# EAGLE board v2nixie (EAGLE 9.6.2)
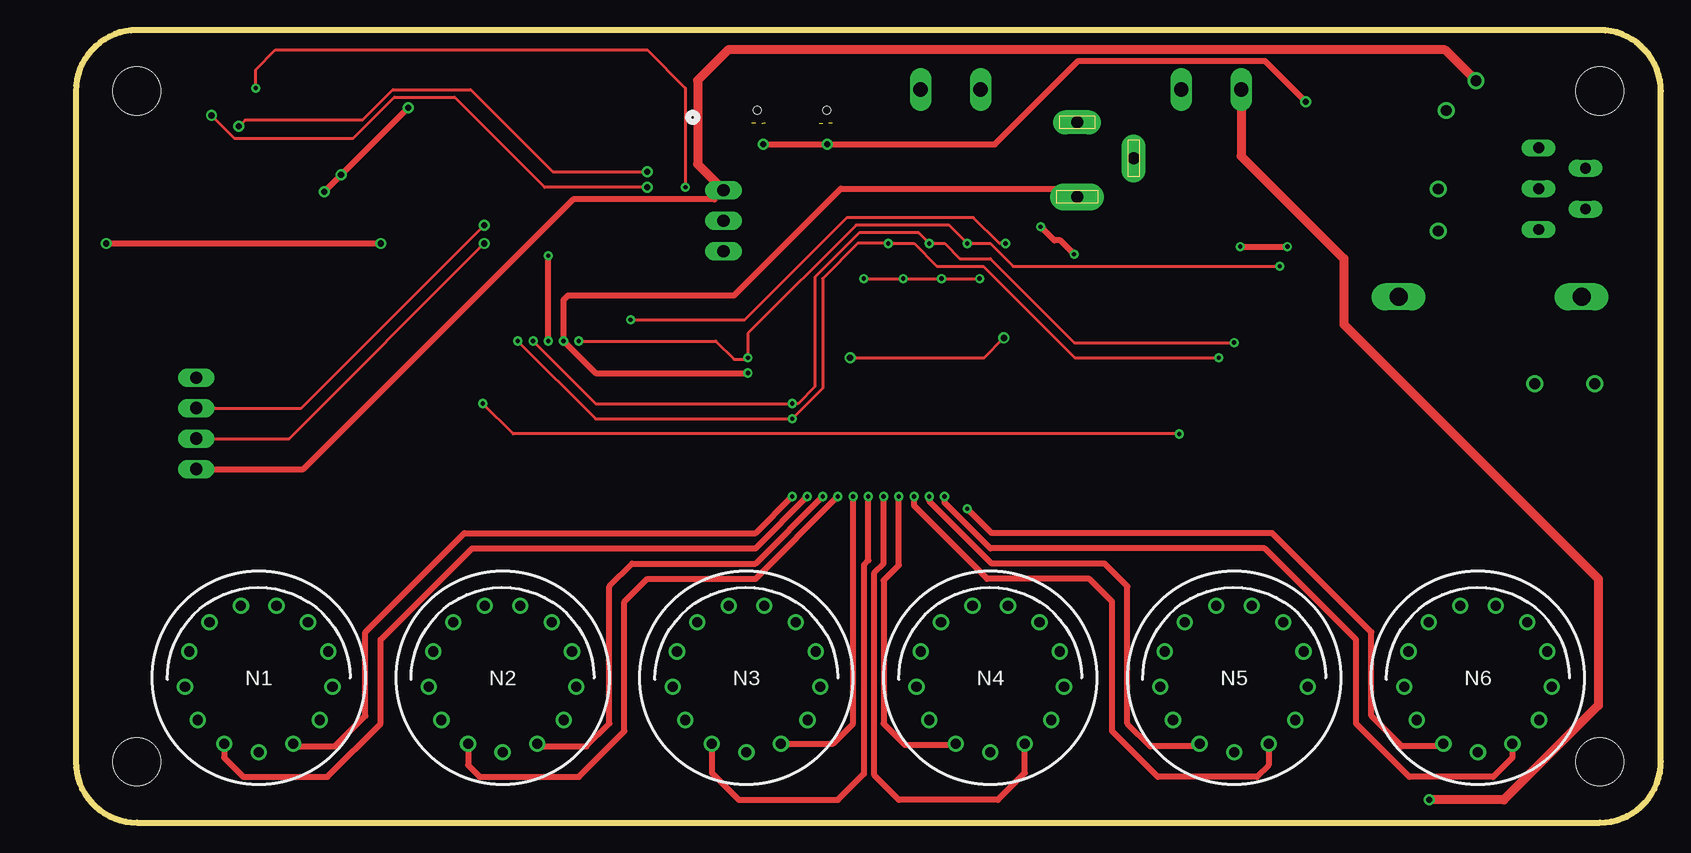
[diagram p0: board, top side]
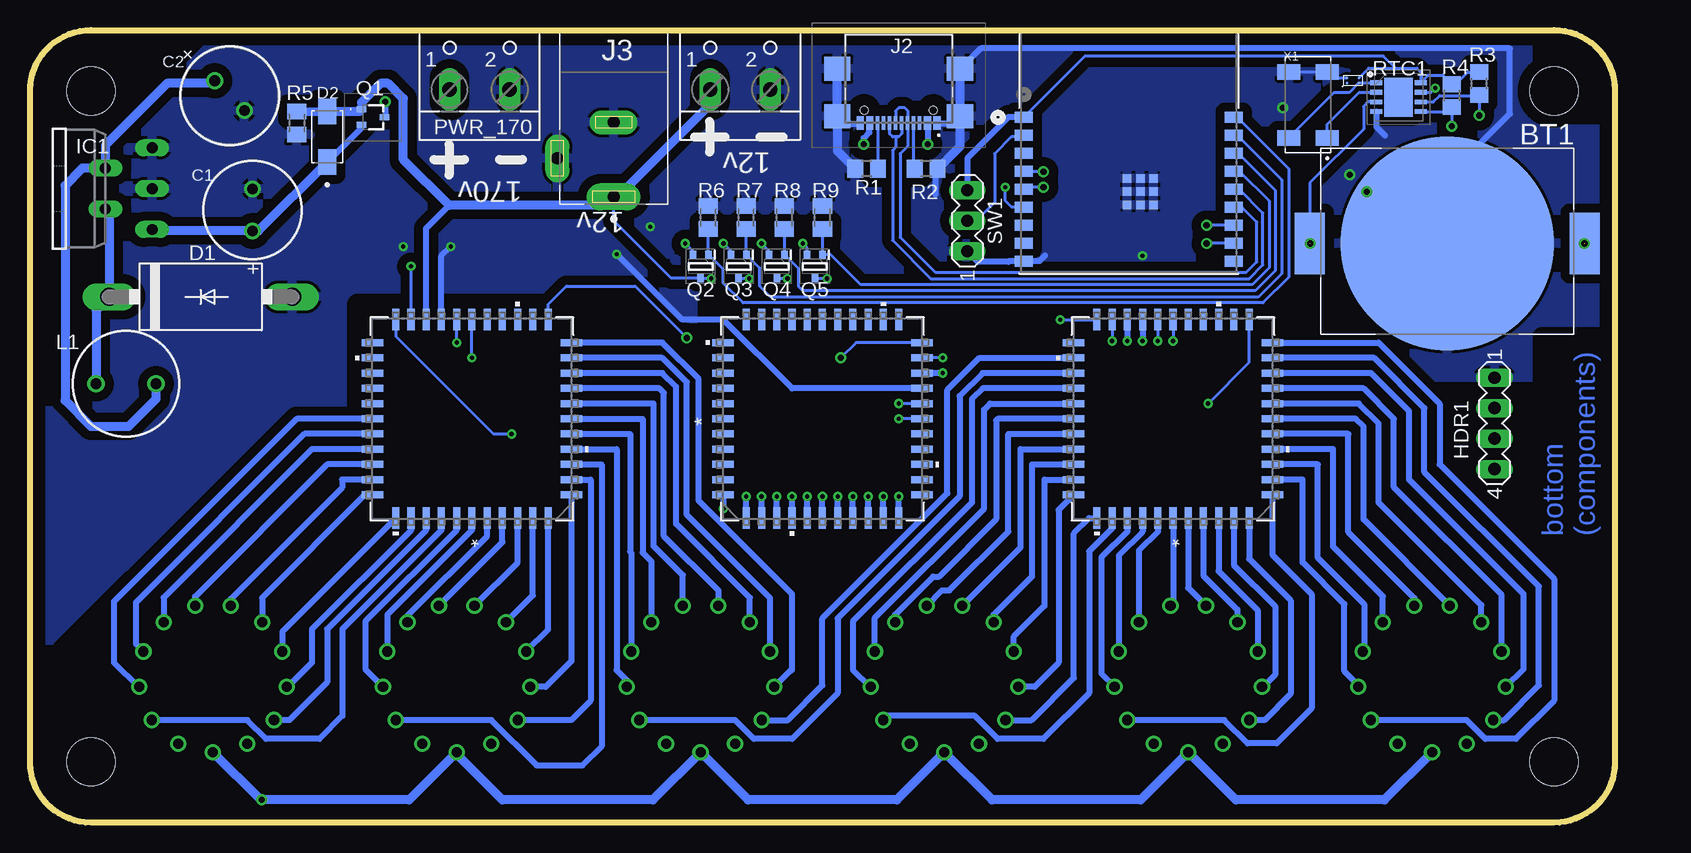
[diagram p1: board, bottom side, seen from below]

Size 132.08 x 66.04 mm. Coordinates in mm from the lower left corner, seen from the top.
Outline: 0,60.96 0,5.08 arc90 5.08,0 127,0 arc90 132.08,5.08 132.08,60.96 arc90 127,66.04 5.08,66.04 arc90 0,60.96
Copper layers (1*16): Top 0.035mm / dielectric 1.5mm / Bottom 0.035mm
Design rules "default *": minimum track width 6mil, minimum drill 0.35mm, track to track 10mil, track to pad 6mil, pad to pad 6mil, via to via 6mil, smd to smd 6mil, copper to edge 40mil, drill to drill 6mil, minimum pad ring 10mil, minimum via ring 8mil, stop-mask expansion 4mil, vias tented up to drill 0mil, thermal gap 10mil
Holes 4 mm at 5.08,60.96 127,60.96 127,5.08 5.08,5.08
bRestrict: area 27.3,24.1 to 46.4,43.2; area 56.5,24.1 to 75.6,43.2; area 85.7,24.1 to 104.8,43.2; area 49.1,46.5 to 52.8,51.3; area 111.8,-1.4 to 135.5,20.3; area 117.8,54.1 to 139.4,77.9; area -2.2,59.1 to 6,67.6; area 0.8,23.2 to 14.6,39.9

## Footprints (pad centres in the part's own frame; a part is rotated, then mirrored left to right if it is on the bottom)
BAT_BAT-HLD-001-TR = smd 17.8 x 17.8: N1 0,0 | smd 2.5 x 5.1: P1 -11.45,0; P2 11.45,0
WCAP-PTG5_8X11.5(DXL) = drill 0.9: 1 1.75,0; 2 -1.75,0
WCAP-PTG5_8X8(DXL) = drill 0.9: 1 1.75,0; 2 -1.75,0
DO201-15 = drill 1.499 long: A 7.62,0; C -7.62,0
DIOM4325X250N = smd 2.12 x 1.5: A 2.115,0; C -2.115,0
MA04-1 = drill 1.016 long: 1 -3.81,0; 2 -1.27,0; 3 1.27,0; 4 3.81,0
TO220-5 = drill 0.9 long: 1 -3.4,-8.4; 2 -1.7,-4.5; 3 0,-8.4; 4 1.7,-4.5; 5 3.4,-8.4
USB4110GFA = smd 0.3 x 1.15: A1 -3.35,3.678; A4 -2.55,3.678; A5 -1.25,3.678; A6 -0.25,3.678; A7 0.25,3.678; A8 1.25,3.678; A9 2.55,3.678; A12 3.35,3.678; B1 3.05,3.678; B4 2.25,3.678; B5 1.75,3.678; B6 0.75,3.678; B7 -0.75,3.678; B8 -1.75,3.678; B9 -2.25,3.678; B12 -3.05,3.678 | smd 2.18 x 2: MP1 -5.11,-0.827; MP2 5.11,-0.827; MP3 -5.11,3.103; MP4 5.11,3.103 | hole 0.65: -2.89,2.603; 2.89,2.603
KYCON_KLDX-0202-AC = drill 1 pad 2.25 long: 1 -6.65,0 | drill 1 pad 2 long: 2 -0.45,0; 3 -3.45,4.7
6000-XXXX-RC = drill 0.9 pad 1.422: 1 -2.5,0; 2 2.5,0
IN-14 = drill 0.84: 0 5.094,-3.516; 1 -5.094,-3.516; 2 -6.145,-0.746; 3 -5.788,2.195; 4 -4.105,4.633; 5 -1.481,6.01; 6 1.481,6.01; 7 4.105,4.633; 8 5.788,2.195; 9 6.145,-0.746; A 0,-6.19; LHDP 2.877,-5.481; RHDP -2.877,-5.481
W237-102 = drill 1.194 long: 1 -2.5,-1.27; 2 2.5,-1.27
SSM3J117TULFT = smd 0.5 x 0.8: 1 -0.65,-0.95; 2 0.65,-0.95; 3 0,0.95
SOTFL65P210X105-3N = smd 0.695 x 0.54: 1 -0.972,0.65; 2 -0.972,-0.65; 3 0.972,0
R0805 = smd 1.3 x 1.5: 1 -0.95,0; 2 0.95,0
M0805 = smd 1.3 x 1.6: 1 -0.95,0; 2 0.95,0
SON80P400X400X100-9N = smd 1 x 0.4: 1 -1.85,1.2; 2 -1.85,0.4; 3 -1.85,-0.4; 4 -1.85,-1.2; 5 1.85,-1.2; 6 1.85,-0.4; 7 1.85,0.4; 8 1.85,1.2 | smd 2.35 x 3.25: 9 0,0
MA03-1 = drill 1.016 long: 1 -2.54,0; 2 0,0; 3 2.54,0
SIT1566 = smd 0.25 x 0.25: CLK_OUT 0.5,-0.2; GND -0.5,0.2; NC -0.5,-0.2; VDD 0.5,0.2
PLCC44_MC_MCH = smd 0.584 x 1.803: 1 0,8.28; 2 -1.27,8.28; 3 -2.54,8.28; 4 -3.81,8.28; 5 -5.08,8.28; 6 -6.35,8.28; 18 -6.35,-8.28; 19 -5.08,-8.28; 20 -3.81,-8.28; 21 -2.54,-8.28; 22 -1.27,-8.28; 23 0,-8.28; 24 1.27,-8.28; 25 2.54,-8.28; 26 3.81,-8.28; 27 5.08,-8.28; 28 6.35,-8.28; 40 6.35,8.28; 41 5.08,8.28; 42 3.81,8.28; 43 2.54,8.28; 44 1.27,8.28 | smd 1.803 x 0.584: 7 -8.28,6.35; 8 -8.28,5.08; 9 -8.28,3.81; 10 -8.28,2.54; 11 -8.28,1.27; 12 -8.28,0; 13 -8.28,-1.27; 14 -8.28,-2.54; 15 -8.28,-3.81; 16 -8.28,-5.08; 17 -8.28,-6.35; 29 8.28,-6.35; 30 8.28,-5.08; 31 8.28,-3.81; 32 8.28,-2.54; 33 8.28,-1.27; 34 8.28,0; 35 8.28,1.27; 36 8.28,2.54; 37 8.28,3.81; 38 8.28,5.08; 39 8.28,6.35
IC18_ESP32-C3-WROOM-02-N4_EXP = smd 1.499 x 0.889: 1 -8.75,2.905; 2 -8.75,1.405; 3 -8.75,-0.095; 4 -8.75,-1.595; 5 -8.75,-3.095; 6 -8.75,-4.595; 7 -8.75,-6.095; 8 -8.75,-7.595; 9 -8.75,-9.095; 10 8.75,-9.095; 11 8.75,-7.595; 12 8.75,-6.095; 13 8.75,-4.595; 14 8.75,-3.095; 15 8.75,-1.595; 16 8.75,-0.095; 17 8.75,1.405; 18 8.75,2.905 | smd 0.711 x 0.711: 19 -0.144,-2.195; 20 0.956,-2.195; 21 2.056,-2.195; 22 -0.144,-3.295; 23 0.956,-3.295; 24 2.056,-3.295; 25 -0.144,-4.395; 26 0.956,-4.395; 27 2.056,-4.395
XTAL_ECS-.327-12.5-17X-C-TR = smd 1.3 x 1.9: 1 -2.75,-1.6; 2 2.75,-1.6; 3 2.75,1.6; 4 -2.75,1.6

## Placement (x,y rotation side)
BT1  BAT-HLD-001-TR  [BAT_BAT-HLD-001-TR]  13.97,48.26 180 bottom
C1  100 µF  [WCAP-PTG5_8X11.5(DXL)]  113.54,51.05 270 bottom
C2  330 µF  [WCAP-PTG5_8X8(DXL)]  115.44,60.58 135 bottom
D1  [DO201-15]  117.86,43.81 0 bottom
D2  SK34A  [DIOM4325X250N]  107.31,57.15 90 bottom
HDR1  [MA04-1]  10.03,33.27 270 bottom
IC1  LM2575-3.3T  [TO220-5]  130.3,52.83 90 bottom
J2  USB4110-GF-A  [USB4110GFA]  59.69,61.98 180 bottom
J3  KLDX-0202-AC  [KYCON_KLDX-0202-AC]  83.44,58.8 90 bottom
L1  330uH  [6000-XXXX-RC]  124.08,36.58 0 bottom
N1  IN-14  [IN-14]  15.24,12.07 0 top
N2  IN-14  [IN-14]  35.56,12.07 0 top
N3  IN-14  [IN-14]  55.88,12.07 0 top
N4  IN-14  [IN-14]  76.2,12.07 0 top
N5  IN-14  [IN-14]  96.52,12.07 0 top
N6  IN-14  [IN-14]  116.84,12.07 0 top
PWR_12V_OUT  [W237-102]  72.9,62.36 0 bottom
PWR_170  [W237-102]  94.62,62.36 0 bottom
Q1  SSM3J117TU,LF_T  [SSM3J117TULFT]  103.51,58.8 270 bottom
Q2  RU1J002YNTCL  [SOTFL65P210X105-3N]  76.2,46.36 270 bottom
Q3  RU1J002YNTCL  [SOTFL65P210X105-3N]  73.03,46.36 270 bottom
Q4  RU1J002YNTCL  [SOTFL65P210X105-3N]  69.85,46.36 270 bottom
Q5  RU1J002YNTCL  [SOTFL65P210X105-3N]  66.68,46.36 270 bottom
R1  5.1K  [R0805]  62.36,54.48 180 bottom
R2  5.1K  [R0805]  57.4,54.48 180 bottom
R3  10K  [R0805]  11.3,61.59 90 bottom
R4  10K  [R0805]  13.59,60.58 90 bottom
R5  10K  [M0805]  109.86,58.29 90 bottom
R6  1K  [M0805]  75.57,50.42 270 bottom
R7  1K  [M0805]  72.39,50.42 270 bottom
R8  1K  [M0805]  69.22,50.42 270 bottom
R9  1K  [M0805]  66.04,50.42 270 bottom
RTC1  PCF8523TK_1,118  [SON80P400X400X100-9N]  18.03,60.45 0 bottom
SW1  [MA03-1]  53.98,50.16 90 bottom
TCXO1  SIT1566  [SIT1566]  21.84,61.85 0 bottom
U1  HV5222PJ-G  [PLCC44_MC_MCH]  36.83,33.66 180 bottom
U2  HV5222PJ-G  [PLCC44_MC_MCH]  95.25,33.66 180 bottom
U3  ESP32-C3-WROOM-02-N4  [IC18_ESP32-C3-WROOM-02-N4_EXP]  40.51,55.88 0 bottom
U4  HV5222PJ-G  [PLCC44_MC_MCH]  66.04,33.66 90 bottom
X1  ECS-.327-12.5-17X-C-TR  [XTAL_ECS-.327-12.5-17X-C-TR]  25.58,59.82 90 bottom

## Library data of the parts
BT1 = BAT-HLD-001-TR; DESCRIPTION: Holder for CR2032 and CR2025 Batteries, Surface-Mount, Tape and Reel Packaging; DIGI-KEY_PART_NUMBER: BAT-HLD-001-TRTR-ND; MF: Linx Technologies; MP: BAT-HLD-001-TR; PACKAGE: None; PURCHASE-URL: https://pricing.snapeda.com/search/part/BAT-HLD-001-TR/?ref=eda
C1 = Wurth_Capacitors_WCAP-PTG5; DATASHEET-URL: https://www.we-online.com/catalog/datasheet/870025374001.pdf; DF: 8%; DIAMETER: 8mm; I-LEAK: 160uA; I-RIPPLE: 4800mA; L: 11.5mm; OPERATING-TEMPERATURE: -55 °C up to +105 °C; PART-NUMBER: 870025374001; PITCH: 3.5mm; TECHNICAL-REFERENCE: PTEE115101M016DSPA7B000; VR: 16V(DC)
C2 = Wurth_Capacitors_WCAP-PTG5; DATASHEET-URL: https://www.we-online.com/catalog/datasheet/870025174004.pdf; DF: 7%; DIAMETER: 8mm; I-LEAK: 416uA; I-RIPPLE: 5100mA; L: 8mm; OPERATING-TEMPERATURE: -55 °C up to +105 °C; PART-NUMBER: 870025174004; PITCH: 3.5mm; TECHNICAL-REFERENCE: PTEE080331M6R3DSPA7B000; VR: 6.3V(DC)
D1 = diode
D2 = SK34A; DESCRIPTION: 3A, 40V, Schottky Rectifier; MF: Taiwan Semiconductor; MP: SK34A-T; PACKAGE: None; PURCHASE-URL: https://pricing.snapeda.com/search/part/SK34A-T/?ref=eda
HDR1 SW1 = con-lstb; OC_FARNELL: unknown; OC_NEWARK: unknown
IC1 = lm2575
J2 = SamacSys_Parts; DESCRIPTION: CONN USB 2.0 TYPE-C R/A SMT; HEIGHT: 3.26mm; MANUFACTURER_NAME: GCT (GLOBAL CONNECTOR TECHNOLOGY); MANUFACTURER_PART_NUMBER: USB4110-GF-A; MOUSER_PART_NUMBER: 640-USB4110-GF-A; MOUSER_PRICE-STOCK: https://www.mouser.co.uk/ProductDetail/GCT/USB4110-GF-A?qs=KUoIvG%2F9IlYiZvIXQjyJeA%3D%3D
J3 = KLDX-0202-AC; DESCRIPTION: Power Barrel Connector Jack 2.00mm ID (0.079), 5.50mm OD (0.217) Through Hole, Right Angle; DIGI-KEY_PART_NUMBER: 2092-KLDX-0202-AC-ND; MF: Kycon; MP: KLDX-0202-AC; PACKAGE: None; PURCHASE-URL: https://pricing.snapeda.com/search/part/KLDX-0202-AC/?ref=eda
L1 = rcl; SPICEPREFIX: L
N1-N6 = nixies-us
PWR_12V_OUT PWR_170 = con-wago-500; MPN: 237-102; OC_FARNELL: unknown; OC_NEWARK: 70K9898; SPICEPREFIX: X
Q1 = SamacSys_Parts; DESCRIPTION: P-Channel 30 V 2A (Ta) 500mW (Ta) Surface Mount UFM; HEIGHT: 0.75mm; MANUFACTURER_NAME: Toshiba; MANUFACTURER_PART_NUMBER: SSM3J117TU,LF(T
Q2-Q5 = SamacSys_Parts; DESCRIPTION: MOSFET,N-channel,50V,200mA,SOT323FL; HEIGHT: 1.05mm; MANUFACTURER_NAME: ROHM Semiconductor; MANUFACTURER_PART_NUMBER: RU1J002YNTCL; MOUSER_PART_NUMBER: 755-RU1J002YNTCL; MOUSER_PRICE-STOCK: https://www.mouser.co.uk/ProductDetail/ROHM-Semiconductor/RU1J002YNTCL?qs=npTsUczJOtM%2FefBcq0SyrQ%3D%3D
R1-R4 = rcl; SPICEPREFIX: R
R5-R9 = resistor
RTC1 = SamacSys_Parts; DESCRIPTION: Real Time Clock Serial Clock/Calendar/Alarm/Timer/Battery Backup 8-Pin HVSON EP T/R; HEIGHT: 1mm; MANUFACTURER_NAME: NXP; MANUFACTURER_PART_NUMBER: PCF8523TK/1,118; MOUSER_PART_NUMBER: 771-PCF8523TK/1118; MOUSER_PRICE-STOCK: https://www.mouser.co.uk/ProductDetail/NXP-Semiconductors/PCF8523TK-1118?qs=beN0Cyoe8Ym%252Bv1xGDkWHJQ%3D%3D
TCXO1 = SIT1566_TCXO
U1 U2 U4 = HV5222PJ-G; COPYRIGHT: Copyright (C) 2022 Ultra Librarian. All rights reserved.; DIGI-KEY_PART_NUMBER_1: HV5222PJ-G-ND; MANUFACTURER_PART_NUMBER: HV5222PJ-G; MFR_NAME: Microchip
U3 = ul_ESP32-C3-WROOM-02-N4; COPYRIGHT: Copyright (C) 2022 Ultra Librarian. All rights reserved.; DIGI-KEY_PART_NUMBER_1: 1965-ESP32-C3-WROOM-02-N4TR-ND; DIGI-KEY_PART_NUMBER_2: 1965-ESP32-C3-WROOM-02-N4CT-ND; DIGI-KEY_PART_NUMBER_3: 1965-ESP32-C3-WROOM-02-N4DKR-ND; MANUFACTURER_PART_NUMBER: ESP32-C3-WROOM-02-N4; MFR_NAME: Espressif Systems
X1 = ECS-.327-12.5-17X-C-TR; DESCRIPTION: 32.768 kHz ±10ppm Crystal 12.5pF 50 kOhms 4-SOJ, 5.50mm pitch; DIGI-KEY_PART_NUMBER: XC1912TR-ND; MF: ECS Inc.; MP: ECS-.327-12.5-17X-C-TR; PACKAGE: 4-4 ECS International; PURCHASE-URL: https://pricing.snapeda.com/search/part/ECS-.327-12.5-17X-C-TR/?ref=eda

## Nets
5-12VIN: C1.1 D2.C IC1.1 Q1.2
+3V3: C2.1 HDR1.4 IC1.4 L1.2 R3.2 R4.2 RTC1.8 SW1.3 TCXO1.VDD U3.1
+12V: D2.A J3.1 PWR_12V_OUT.1 Q1.1 Q2.3 Q3.3 Q4.3 Q5.3 R5.2 U1.26 U2.26 U4.26
CHIPLINK: U1.18 U2.28
CHIPLINK2: U2.18 U4.28
CLK: Q4.2 U1.24 U2.24 U4.24
ESP_CLK: Q4.1 R8.2 U3.16
ESP_OUTEN: Q5.1 R9.2 U3.15
ESP_SHFT: Q2.1 R6.2 U3.18
ESP_STR: Q3.1 R7.2 U3.17
GND: BT1.N1 C1.2 C2.2 D1.A HDR1.1 IC1.3 IC1.5 J2.A1 J2.A12 J2.B1 J2.B12 J2.MP1 J2.MP2 J2.MP3 J2.MP4 J3.2 J3.3 PWR_12V_OUT.2 PWR_170.2 R1.2 R2.1 R5.1 R6.1 R7.1 R8.1 R9.1 RTC1.4 SW1.1 TCXO1.GND U1.25 U2.25 U3.9 U3.19 U3.20 U3.21 U3.22 U3.23 U3.24 U3.25 U3.26 U3.27 U4.25 X1.2 X1.3
INT: RTC1.7 U3.6
N1_D0: N1.0 U1.17
N1_D1: N1.1 U1.16
N1_D2: N1.2 U1.15
N1_D3: N1.3 U1.14
N1_D4: N1.4 U1.13
N1_D5: N1.5 U1.12
N1_D6: N1.6 U1.11
N1_D7: N1.7 U1.10
N1_D8: N1.8 U1.9
N1_D9: N1.9 U1.8
N1_L: N1.LHDP U4.17
N1_R: N1.RHDP U4.16
N2_D0: N2.0 U1.7
N2_D1: N2.1 U1.6
N2_D2: N2.2 U1.5
N2_D3: N2.3 U1.4
N2_D4: N2.4 U1.3
N2_D5: N2.5 U1.2
N2_D6: N2.6 U1.1
N2_D7: N2.7 U1.44
N2_D8: N2.8 U1.43
N2_D9: N2.9 U1.42
N2_L: N2.LHDP U4.15
N2_R: N2.RHDP U4.14
N3_D0: N3.0 U1.41
N3_D1: N3.1 U1.40
N3_D2: N3.2 U1.39
N3_D3: N3.3 U1.38
N3_D4: N3.4 U1.37
N3_D5: N3.5 U1.36
N3_D6: N3.6 U1.35
N3_D7: N3.7 U1.34
N3_D8: N3.8 U1.33
N3_D9: N3.9 U1.32
N3_L: N3.LHDP U4.13
N3_R: N3.RHDP U4.12
N4_D0: N4.0 U1.31
N4_D1: N4.1 U1.30
N4_D2: N4.2 U2.17
N4_D3: N4.3 U2.16
N4_D4: N4.4 U2.15
N4_D5: N4.5 U2.14
N4_D6: N4.6 U2.13
N4_D7: N4.7 U2.12
N4_D8: N4.8 U2.11
N4_D9: N4.9 U2.10
N4_L: N4.LHDP U4.11
N4_R: N4.RHDP U4.10
N5_D0: N5.0 U2.9
N5_D1: N5.1 U2.8
N5_D2: N5.2 U2.7
N5_D3: N5.3 U2.6
N5_D4: N5.4 U2.5
N5_D5: N5.5 U2.4
N5_D6: N5.6 U2.3
N5_D7: N5.7 U2.2
N5_D8: N5.8 U2.1
N5_D9: N5.9 U2.44
N5_L: N5.LHDP U4.9
N5_R: N5.RHDP U4.8
N6_D0: N6.0 U2.43
N6_D1: N6.1 U2.42
N6_D2: N6.2 U2.41
N6_D3: N6.3 U2.40
N6_D4: N6.4 U2.39
N6_D5: N6.5 U2.38
N6_D6: N6.6 U2.37
N6_D7: N6.7 U2.36
N6_D8: N6.8 U2.35
N6_D9: N6.9 U2.34
N6_L: N6.LHDP U4.7
N6_R: N6.RHDP U4.6
N$1: J2.A5 R2.2
N$2: SW1.2 U3.2
N$3: J2.B5 R1.1
N$5: D1.C IC1.2 L1.1
OSC_IN: RTC1.1 TCXO1.CLK_OUT X1.4
OSC_OUT: RTC1.2 X1.1
OUT_EN: Q5.2 U1.23 U2.23 U4.23
RXD: HDR1.3 U3.11
SCL: R3.1 RTC1.6 U3.5
SDA: R4.1 RTC1.5 U3.4
SHIFT_DATA: Q2.2 U1.28
STR: Q3.2 U1.27 U2.27 U4.27
TXD: HDR1.2 U3.12
USB+: J2.A6 J2.B6 U3.14
USB-: J2.A7 J2.B7 U3.13
V+: N1.A N2.A N3.A N4.A N5.A N6.A PWR_170.1
VBAT: BT1.P1 BT1.P2 RTC1.3
VCC: J2.A4 J2.A9 J2.B4 J2.B9 Q1.3

## Tracks (layer width: path | path; a pad name or v marks a point on that pad's centre or on a via)
5-12VIN
  Bottom 0.508: Q1.2 104.46,57.89 D2.C
  Bottom 0.762: IC1.1 121.77,49.3 C1.1 113.05,49.3 D2.C
+3V3
  Top 0.508: HDR1.4 18.96,29.46 41.44,51.94 53.21,51.94 SW1.3
  Top 0.762: C2.1 114.11,64.39 54.36,64.39 51.82,61.85 51.82,54.86 SW1.3
  Bottom 0.254: R3.2 12.26,62.55 13.27,61.53 R4.2 14.35,62.29 15.55,62.29 RTC1.8 16.18,62.54 16.51,62.87 18.29,62.87 | TCXO1.VDD 20.53,62.87 18.29,62.87 | 18.29,62.87 19.3,63.88 44.17,63.88 U3.1
  Bottom 0.508: SW1.3 53.98,55.36 50.55,58.78 U3.1
  Bottom 0.762: C2.1 116.9,61.59 120.65,61.59 125.8,56.44 IC1.4 127.71,54.53 129.16,53.09 129.16,35.18 127,33.02 123.87,33.02 121.58,35.31 L1.2
+12V  (via drill 0.35)
  Top 0.254: v65.66,45.34 v68.96,45.34 v72.14,45.34 v75.31,45.34
  Top 0.508: v56.01,37.47 43.31,37.47 v40.64,40.13 40.64,43.56 41.02,43.94 54.86,43.94 63.75,52.83 82.76,52.83 J3.1
  Bottom 0.254: v75.31,45.34 75.36,45.38 Q2.3 78.66,45.38 83.44,50.16 J3.1 | Q3.3 72.18,45.38 v72.14,45.34 | Q4.3 69.01,45.38 v68.96,45.34 | Q5.3 65.7,45.38 v65.66,45.34
  Bottom 0.508: U1.26 v40.64,40.13 | v56.01,37.47 U4.26 | U2.26 99.06,49.53 97.16,51.44
  Bottom 0.762: PWR_12V_OUT.1 75.4,59.86 83.1,52.15 J3.1 83.83,52.15 84.54,51.44 97.16,51.44 100.97,55.25 100.97,60.33 102.24,61.59 102.87,61.59 104.46,60.01 Q1.1 104.64,59.27 D2.A R5.2
CHIPLINK  (via drill 0.35)
  Top 0.254: v91.95,32.38 36.45,32.38 v33.91,34.92
  Bottom 0.254: U2.28 101.6,40.51 93.47,32.38 v91.95,32.38 | v33.91,34.92 30.48,38.35 U1.18
CHIPLINK2  (via drill 0.51)
  Top 0.254: v64.52,38.73 75.69,38.73 v77.34,40.39
  Bottom 0.254: U4.28 63.25,40.01 v64.52,38.73 | v77.34,40.39 81.66,44.7 87.38,44.7 88.9,43.18 U2.18
CLK  (via drill 0.35)
  Top 0.254: v38.1,40.13 43.31,34.92 v59.69,34.92 60.2,34.92 61.6,36.32 61.6,45.47 65.28,49.15 70.23,49.15 v71.12,48.26 72.39,48.26 73.66,46.99 76.2,46.99 83.19,40.01 v96.52,40.01
  Bottom 0.254: Q4.2 70.5,47.64 v71.12,48.26 | U4.24 v59.69,34.92 | U1.24 v38.1,40.13 | v96.52,40.01 U2.24
ESP_CLK
  Bottom 0.254: U3.16 31.48,55.5 31.12,55.5 28.32,52.7 28.32,45.97 29.97,44.32 67.69,44.32 68.06,44.69 68.06,46.18 Q4.1 69.2,49.45 R8.2
ESP_OUTEN
  Bottom 0.254: U3.15 31.3,54.28 28.83,51.82 28.83,46.23 30.23,44.83 62.87,44.83 65.36,47.33 Q5.1 66.03,49.45 R9.2
ESP_SHFT
  Bottom 0.254: U3.18 31.4,58.42 31.12,58.42 27.18,54.48 27.18,45.47 29.34,43.31 72.64,43.31 74.3,44.96 74.3,46.1 75.52,47.33 Q2.1 75.55,49.45 R6.2
ESP_STR
  Bottom 0.254: U3.17 31.37,56.9 31.12,56.9 27.79,53.57 27.79,45.75 29.74,43.79 70.33,43.79 71.25,44.7 71.25,46.2 Q3.1 72.38,49.45 R7.2
GND  (via drill 0.35, 0.51)  (2 unrouted)
  Top 0.508: v39.37,40.13 v39.37,47.24 | v80.39,49.66 81.53,48.51 82.04,48.51 v83.19,47.37 | v97.03,48.01 v100.97,48.01 | v27.69,59.56 v22.1,53.98 v20.7,52.58
  Bottom 0.254: X1.3 X1.2 23.46,62.05 TCXO1.GND
  Bottom 0.508: U1.25 v39.37,40.13 | U4.25 68.58,36.2 74.3,41.91 77.72,41.91 v83.19,47.37 | 47.5,47.24 47.96,46.78 U3.9 50.5,46.78 50.55,46.74 53.09,46.74 SW1.1 | R2.1 56.64,54.3 56.64,52.32 | RTC1.4 19.88,57.98 19.18,57.28 | BT1.N1 13.97,53.85 8.76,59.05 8.76,64.52 52.87,64.52 J2.MP1 | J2.A1 55.16,58.3 J2.MP3 | J2.MP4 64.17,58.24 63.1,58.24 J2.A12 | U2.25 97.79,47.24 v97.03,48.01
  Bottom 0.762: J2.MP2 J2.MP4 64.8,55.98 R1.2 | J2.MP1 J2.MP3 54.58,56.36 R2.1
  pour Bottom (isolate 0.762): 0,66.04 132.08,66.04 132.08,0 0,0
INT  (via drill 0.35)
  Top 0.254: v14.99,61.21 14.99,62.74 16.64,64.39 47.63,64.39 50.8,61.21 v50.8,52.96
  Bottom 0.254: RTC1.7 15.35,60.85 v14.99,61.21 | U3.6 50.27,51.28 50.8,51.82 v50.8,52.96
N1_D0
  Bottom 0.508: U1.17 19.69,40.01 14.61,34.92 14.61,29.84 5.08,20.32 5.08,10.16 8.26,6.98 10.8,6.98 12.36,8.55 N1.0
N1_D1
  Bottom 0.508: N1.1 9.23,8.55 6.35,11.43 6.35,19.69 15.88,29.21 15.88,34.54 20.07,38.73 U1.16
N1_D2
  Bottom 0.508: N1.2 7.62,12.79 7.62,19.05 17.15,28.58 17.15,34.29 20.32,37.47 U1.15
N1_D3
  Bottom 0.508: N1.3 9.45,18.98 18.42,27.94 18.42,33.66 20.96,36.2 U1.14
N1_D4
  Bottom 0.508: N1.4 11.14,18.12 19.69,26.67 19.69,33.27 21.34,34.92 U1.13
N1_D5
  Bottom 0.508: N1.5 20.96,25.27 20.96,33.02 21.59,33.66 U1.12
N1_D6
  Bottom 0.508: N1.6 16.72,18.71 22.23,24.21 22.23,32.38 U1.11
N1_D7
  Bottom 0.508: N1.7 19.35,18.86 23.5,23.01 23.5,31.12 U1.10
N1_D8
  Bottom 0.508: N1.8 20.9,14.39 20.9,18.2 24.77,22.06 24.77,29.84 U1.9
N1_D9
  Bottom 0.508: N1.9 21.39,11.45 22.56,12.62 22.56,18.21 26.04,21.68 26.04,28.58 U1.8
N1_L  (via drill 0.35)
  Top 0.508: N1.LHDP 18.35,6.35 21.59,6.35 24.13,8.89 24.13,15.88 32.39,24.13 56.64,24.13 v59.69,27.18
  Bottom 0.508: U4.17 v59.69,27.18
N1_R  (via drill 0.35)
  Top 0.508: N1.RHDP 12.36,5.42 13.97,3.81 20.96,3.81 25.4,8.26 25.4,15.24 33.02,22.86 56.64,22.86 v60.96,27.18
  Bottom 0.508: U4.16 v60.96,27.18
N2_D0
  Bottom 0.508: U1.7 28.55,22.33 25.27,19.05 25.27,9.53 28.19,6.6 30.61,6.6 32.55,8.55 N2.0
N2_D1
  Bottom 0.508: U1.6 30.48,21.97 27.03,18.52 27.03,10.72 29.2,8.55 N2.1
N2_D2
  Bottom 0.508: U1.5 31.75,21.46 28.32,18.03 28.32,12.32 29.32,11.32 N2.2
N2_D3
  Bottom 0.508: U1.4 33.02,20.96 29.77,17.71 N2.3
N2_D4
  Bottom 0.508: U1.3 34.29,20.57 31.46,17.74 N2.4
N2_D5
  Bottom 0.508: N2.5 35.56,19.56 U1.2
N2_D6
  Bottom 0.508: U1.1 36.83,18.39 37.04,18.18 N2.6
N2_D7
  Bottom 0.508: U1.44 38.1,24.26 39.67,22.69 N2.7
N2_D8
  Bottom 0.508: U1.43 39.37,24.26 41.35,22.28 N2.8
N2_D9
  Bottom 0.508: U1.42 40.64,24.26 42.8,22.1 42.8,12.41 N2.9
N2_L  (via drill 0.35)
  Top 0.508: N2.LHDP 38.67,6.35 42.55,6.35 44.45,8.26 44.45,19.69 46.36,21.59 56.64,21.59 v62.23,27.18
  Bottom 0.508: U4.15 v62.23,27.18
N2_R  (via drill 0.35)
  Top 0.508: N2.RHDP 32.68,4.78 33.66,3.81 41.91,3.81 45.72,7.62 45.72,18.41 47.63,20.32 56.64,20.32 v63.5,27.18
  Bottom 0.508: U4.14 v63.5,27.18
N3_D0
  Bottom 0.508: U1.41 41.91,24.51 43.82,22.61 43.82,10.8 47.63,6.98 51.44,6.98 53.34,8.89 60.63,8.89 N3.0
N3_D1
  Bottom 0.508: N3.1 48.6,8.55 45.09,12.07 45.09,24.11 43.82,25.38 U1.40
N3_D2
  Bottom 0.508: U1.39 46.36,26.06 46.36,13.34 48.37,11.32 N3.2
N3_D3
  Bottom 0.508: N3.3 50.09,15.53 47.55,18.07 47.55,28.58 U1.38
N3_D4
  Bottom 0.508: N3.4 51.78,17.33 48.6,20.51 48.6,29.84 U1.37
N3_D5
  Bottom 0.508: N3.5 49.53,22.94 49.53,31.12 U1.36
N3_D6
  Bottom 0.508: N3.6 56.09,19.34 55.46,19.34 50.55,24.25 50.55,32.38 U1.35
N3_D7
  Bottom 0.508: U1.34 51.44,33.66 51.56,33.53 51.56,25.27 56.33,20.51 56.81,20.51 59.99,17.33 N3.7
N3_D8
  Bottom 0.508: N3.8 61.67,17.07 52.58,26.16 52.58,34.42 52.07,34.92 U1.33
N3_D9
  Bottom 0.508: U1.32 52.71,36.2 53.59,35.31 53.59,26.67 63.5,16.76 63.5,12.7 62.12,11.32 N3.9
N3_L  (via drill 0.35)
  Top 0.508: N3.LHDP 63.1,6.58 64.77,8.26 v64.77,27.18
  Bottom 0.508: U4.13 v64.77,27.18
N3_R  (via drill 0.35)
  Top 0.508: N3.RHDP 53,4.15 55.25,1.91 63.5,1.91 65.66,4.06 65.66,21.46 66.04,21.84 v66.04,27.18
  Bottom 0.508: U4.12 v66.04,27.18
N4_D0
  Bottom 0.508: U1.31 52.71,37.47 54.61,35.56 54.61,27.18 64.77,17.02 64.77,10.8 68.58,6.98 71.76,6.98 73.32,8.55 N4.0
N4_D1
  Bottom 0.508: N4.1 68.92,8.55 66.04,11.43 66.04,17.02 55.63,27.43 55.63,36.07 52.96,38.73 U1.30
N4_D2
  Bottom 0.508: N4.2 68.67,12.7 68.58,12.7 68.58,19.05 76.36,26.83 76.36,36.99 79.38,40.01 U2.17
N4_D3
  Bottom 0.508: N4.3 70.41,18.71 77.34,25.64 77.34,36.7 79.38,38.73 U2.16
N4_D4
  Bottom 0.508: N4.4 72.09,18.75 78.23,24.89 78.23,36.32 79.38,37.47 U2.15
N4_D5
  Bottom 0.508: N4.5 74.72,19.34 79.25,23.87 79.25,35.81 79.63,36.2 U2.14
N4_D6
  Bottom 0.508: N4.6 77.68,20.62 80.14,23.07 80.14,34.92 U2.13
N4_D7
  Bottom 0.508: N4.7 80.31,21.78 81.03,22.5 81.03,33.66 U2.12
N4_D8
  Bottom 0.508: N4.8 81.99,22.52 82.07,22.59 82.07,32.38 U2.11
N4_D9
  Bottom 0.508: U2.10 83.19,31.12 83.19,12.7 82.34,11.86 N4.9
N4_L  (via drill 0.35)
  Top 0.508: v67.31,27.18 67.31,21.59 66.55,20.83 66.55,3.94 68.58,1.91 76.84,1.91 79.08,4.15 N4.LHDP
  Bottom 0.508: U4.11 v67.31,27.18
N4_R  (via drill 0.35)
  Top 0.508: v68.58,27.18 68.58,21.46 67.31,20.19 67.31,8.26 69.09,6.48 73.22,6.48 N4.RHDP
  Bottom 0.508: U4.10 v68.58,27.18
N5_D0
  Bottom 0.508: U2.9 84.46,29.84 84.46,6.35 86.04,4.76 89.85,4.76 93.64,8.55 N5.0
N5_D1
  Bottom 0.508: U2.8 85.37,28.58 85.37,10.16 86.98,8.55 N5.1
N5_D2
  Bottom 0.508: U2.7 86.97,13.45 89.11,11.32 N5.2
N5_D3
  Bottom 0.508: N5.3 88.9,16.09 U2.6
N5_D4
  Bottom 0.508: N5.4 90.17,18.94 U2.5
N5_D5
  Bottom 0.508: N5.5 91.44,21.67 U2.4
N5_D6
  Bottom 0.508: N5.6 92.71,23.37 U2.3
N5_D7
  Bottom 0.508: N5.7 100.62,17.23 93.98,23.88 U2.2
N5_D8
  Bottom 0.508: U2.1 95.25,24.38 102.31,17.33 N5.8
N5_D9
  Bottom 0.508: N5.9 104.14,12.79 104.14,16.76 96.52,24.38 U2.44
N5_L  (via drill 0.35)
  Top 0.508: N5.LHDP 99.4,4.78 98.43,3.81 90.17,3.81 86.36,7.62 86.36,18.41 84.46,20.32 75.95,20.32 69.85,26.42 v69.85,27.18
  Bottom 0.508: U4.9 v69.85,27.18
N5_R  (via drill 0.35)
  Top 0.508: N5.RHDP 93.41,6.35 89.54,6.35 87.63,8.26 87.63,19.69 85.73,21.59 76.33,21.59 71.12,26.8 v71.12,27.18
  Bottom 0.508: U4.8 v71.12,27.18
N6_D0
  Bottom 0.508: N6.0 113.96,8.55 112.4,6.98 107.95,6.98 106.05,8.89 106.05,16.13 97.79,24.38 U2.43
N6_D1
  Bottom 0.508: U2.42 99.06,24.38 107.31,16.13 107.31,11.71 110.48,8.55 N6.1
N6_D2
  Bottom 0.508: N6.2 110.6,11.32 108.59,13.34 108.59,16.13 100.33,24.38 U2.41
N6_D3
  Bottom 0.508: U2.40 111.05,15.92 N6.3
N6_D4
  Bottom 0.508: U2.39 104.17,27.3 112.74,18.73 N6.4
N6_D5
  Bottom 0.508: N6.5 115.36,18.63 106.07,27.91 106.07,28.58 U2.38
N6_D6
  Bottom 0.508: U2.37 107.31,29.84 118.32,18.84 N6.6
N6_D7
  Bottom 0.508: U2.36 108.59,31.12 120.95,18.75 N6.7
N6_D8
  Bottom 0.508: U2.35 109.22,32.38 123.26,18.34 123.26,14.89 N6.8
N6_D9
  Bottom 0.508: U2.34 109.86,33.66 125.09,18.41 125.09,13.34 123.08,11.32 N6.9
N6_L  (via drill 0.35)
  Top 0.508: N6.LHDP 119.72,5.42 118.11,3.81 111.12,3.81 106.68,8.26 106.68,15.24 99.06,22.86 76.2,22.86 72.39,26.67 v72.39,27.18
  Bottom 0.508: U4.7 v72.39,27.18
N6_R  (via drill 0.35)
  Top 0.508: N6.RHDP 113.73,6.35 110.49,6.35 107.95,8.89 107.95,15.88 99.7,24.13 76.33,24.13 v74.3,26.16
  Bottom 0.508: U4.6 74.32,26.19 v74.3,26.16
N$1
  Bottom 0.254: R2.2 58.44,54.57 J2.A5
N$2
  Bottom 0.254: U3.2 49.4,57.15 50.29,57.15 51.69,55.75 51.69,51.69 53.21,50.16 SW1.2
N$3
  Bottom 0.254: J2.B5 61.44,54.52 R1.1
N$5
  Bottom 0.762: IC1.2 125.48,50.81 D1.C 126.58,42.71 L1.1
OSC_IN
  Bottom 0.254: X1.4 23.41,60.83 22.16,60.83 TCXO1.CLK_OUT RTC1.1
OSC_OUT
  Bottom 0.254: X1.1 23.98,58.19 21.32,60.85 RTC1.2
OUT_EN  (via drill 0.35)
  Top 0.254: v36.83,40.13 43.31,33.66 v59.69,33.66 62.23,36.2 62.23,45.34 65.15,48.26 v67.69,48.26 69.85,48.26 71.76,46.36 75.62,46.36 83.25,38.73 v95.25,38.73
  Bottom 0.254: Q5.2 67.33,47.89 v67.69,48.26 | U4.23 v59.69,33.66 | U1.23 v36.83,40.13 | v95.25,38.73 U2.23
RXD  (via drill 0.51)
  Top 0.254: HDR1.3 17.78,32 v34.04,48.26
  Bottom 0.254: U3.11 34.01,48.28 v34.04,48.26
SCL  (via drill 0.51)
  Top 0.254: v11.3,58.93 13.21,57.02 23.11,57.02 26.54,60.45 31.56,60.45 39.08,52.93 47.6,52.93 v47.63,52.96
  Bottom 0.254: RTC1.6 15.13,60.05 14.61,60.58 11.37,60.58 R3.1 v11.3,58.93 | v47.63,52.96 49.09,52.96 U3.5
SDA  (via drill 0.51)
  Top 0.254: v13.59,58.04 14.1,58.55 23.88,58.55 26.42,61.09 32.89,61.09 39.75,54.23 v47.63,54.23
  Bottom 0.254: RTC1.5 13.97,59.25 R4.1 v13.59,58.04 | v47.63,54.23 49.21,54.23 U3.4
SHIFT_DATA  (via drill 0.35)
  Top 0.254: v77.47,48.26 76.96,48.26 74.8,50.42 64.26,50.42 55.75,41.91 v46.23,41.91
  Bottom 0.254: Q2.2 76.85,47.64 v77.47,48.26 | v46.23,41.91 43.21,41.91 U1.28
STR  (via drill 0.35)
  Top 0.254: v41.91,40.13 53.34,40.13 54.86,38.61 55.88,38.61 v56.01,38.73 56.01,40.77 65.02,49.78 72.77,49.78 v74.3,48.26 76.2,48.26 78.11,46.36 v100.33,46.36
  Bottom 0.254: Q3.2 73.68,47.64 v74.3,48.26 | v56.01,38.73 U4.27 | U1.27 v41.91,40.13 | U2.27 v100.33,46.36
TXD  (via drill 0.51)
  Top 0.254: HDR1.2 18.8,34.54 v34.04,49.78
  Bottom 0.254: U3.12 v34.04,49.78
USB+
  Bottom 0.254: J2.A6 59.44,57.41 59.44,57.4 59.69,57.15 59.94,57.15 | 59.94,57.15 60.2,57.15 60.44,57.39 J2.B6 | 59.94,57.15 59.94,56.26 60.2,56.01 60.2,48.51 57.02,45.34 30.48,45.34 29.34,46.48 29.34,50.8 31.32,52.78 U3.14
USB-
  Bottom 0.254: U3.13 31.09,51.28 29.85,50.04 29.85,46.74 30.73,45.85 56.64,45.85 59.56,48.77 59.56,55.75 58.94,56.38 J2.B7 58.93,58.31 58.93,59.31 59.18,59.56 59.68,59.56 59.94,59.3 J2.A7
V+  (via drill 0.51)
  Top 0.762: PWR_170.1 97.12,55.54 105.66,46.99 105.66,41.53 126.87,20.32 126.87,9.78 119,1.91 v112.78,1.91
  Bottom 0.762: N1.A 19.21,1.91 31.59,1.91 N2.A 39.53,1.91 51.91,1.91 N3.A 59.85,1.91 72.23,1.91 N4.A 80.17,1.91 92.71,1.91 96.52,5.72 N5.A 100.49,1.91 v112.78,1.91 112.87,1.91 N6.A
VBAT  (via drill 0.51)  (2 unrouted)
  Top 0.508: v2.54,48.26 v25.4,48.26
  Bottom 0.254: RTC1.3 20.59,60.05 20.96,59.69 20.96,57.78 25.42,53.32 BT1.P2
VCC  (via drill 0.51)  (4 unrouted)
  Top 0.508: v57.28,56.52 v62.61,56.52 76.58,56.52 83.54,63.48 99.09,63.48 v102.49,60.07
  Bottom 0.508: 57.28,58.3 v57.28,56.52 | v62.61,56.52 62.61,57.04 62.12,57.53 62.12,58.29 | v102.49,60.07 102.49,58.87 Q1.3

## Text on the board
Bottom: bottom / (components)
bNames: 12v | 170v | 12v
bStop: bottom / (components)